# Altium PCB MBOARD.PCBDOC
Units mm, origin at the board's own origin, x right, y up, seen from the top; angles counter-clockwise.
Board outline 159.13 x 95.5 mm, 2 copper layers (Top Layer, Bottom Layer); 49 components, 50 nets, 204 pads, 90 vias.
Unrouted connection lines stored in the file: 152.
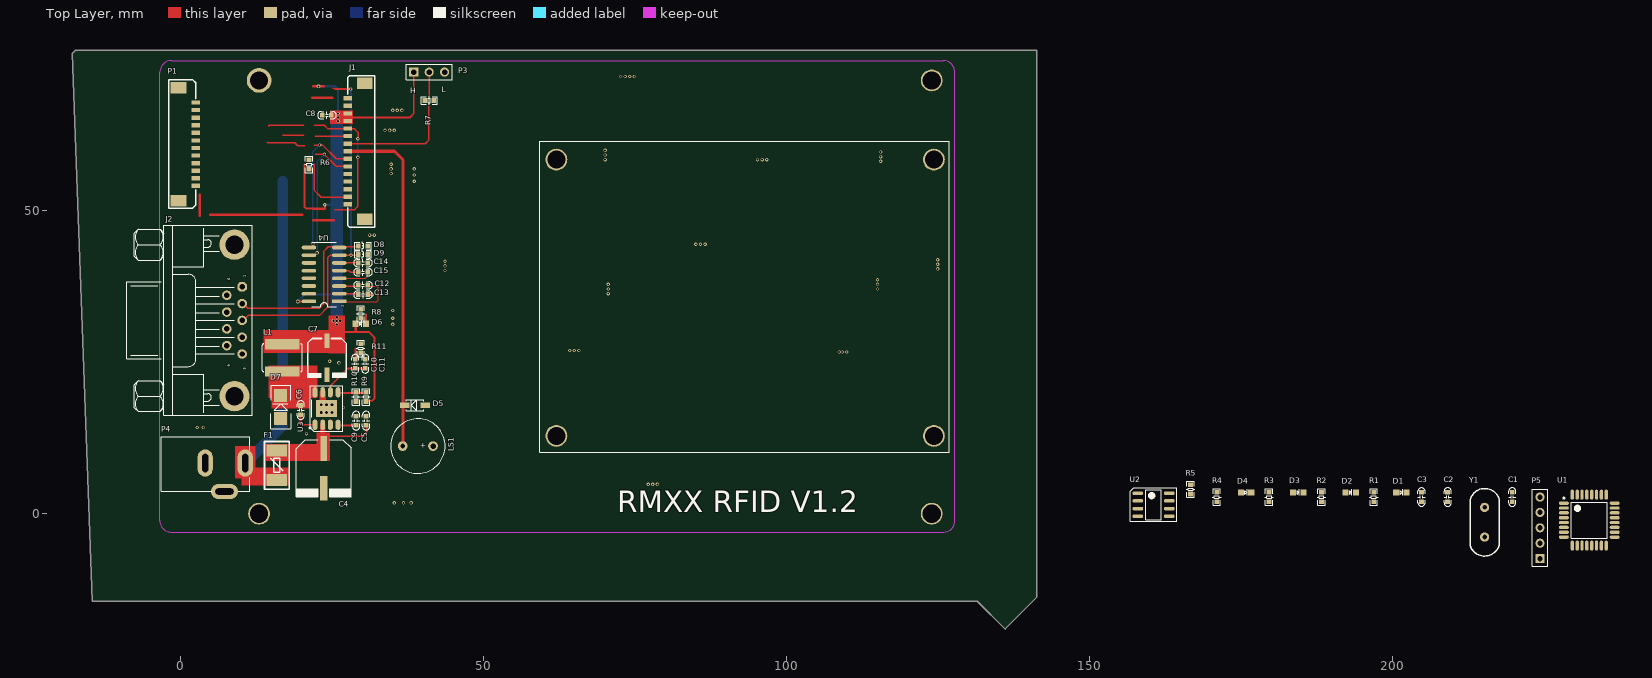
[diagram p0: Top Layer view]
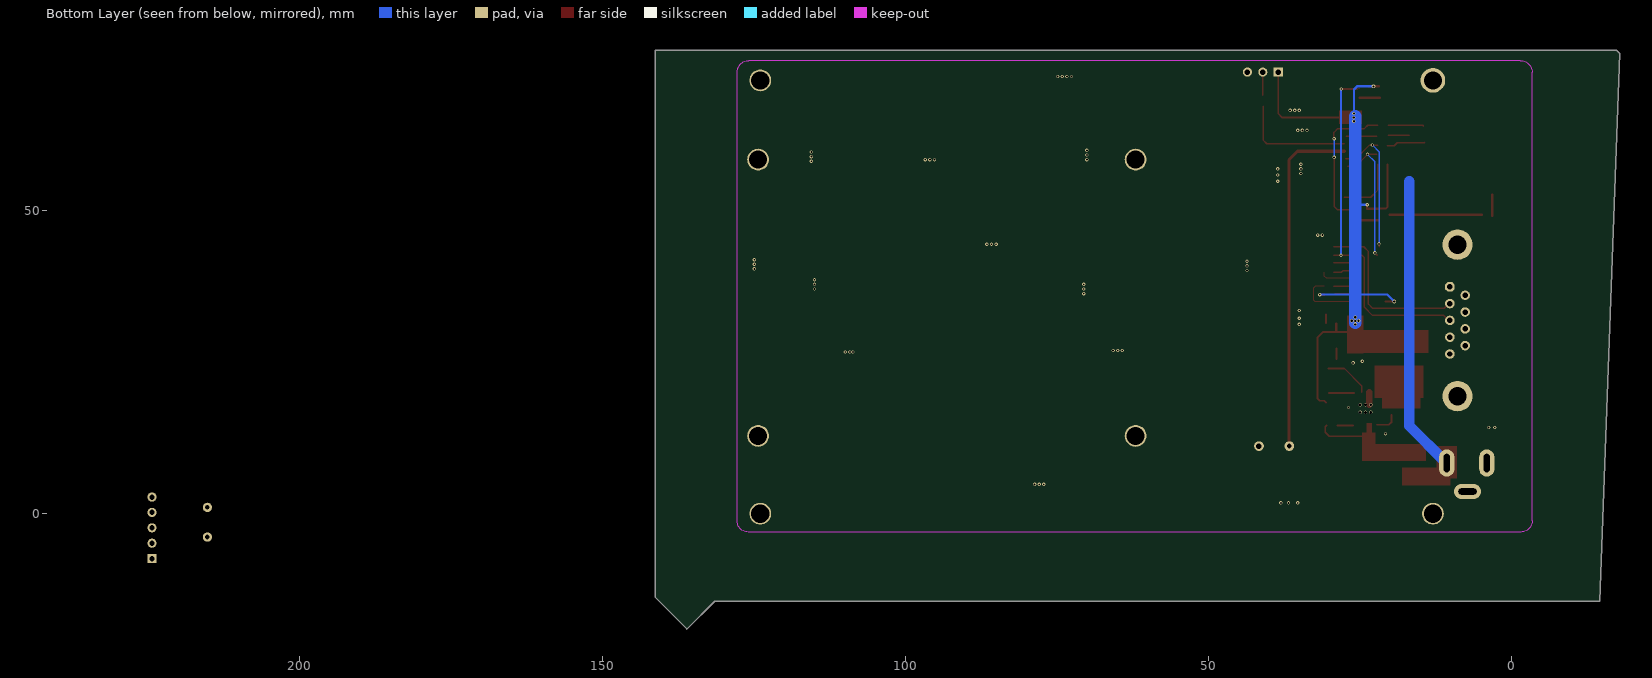
[diagram p1: Bottom Layer view, seen from below]

## Layer stack, top to bottom
Top Solder: solder mask 0.0102, Solder Resist, Dk 3.5
Top Layer: signal copper 0.0356
Dielectric1: core 0.32, FR-4, Dk 4.8
Bottom Layer: signal copper 0.0356
Bottom Solder: solder mask 0.0102, Solder Resist, Dk 3.5

## Board outline
-17.823,75.961 -17.315,76.469 141.308,76.469 141.308,-13.828 136.101,-19.035 131.529,-14.463 -14.521,-14.463

## Design rules (kind name [scope] priority, off if disabled: settings)
Clearance [All] p1 off: gap=0.381
ComponentClearance [All] p1 off: gap=0.254 collisioncheckmode=3 verticalgap=0.254 showdistances=FALSE
FabricationTestPointUsage TestPointUsage [All] p1: valid=0 allowmultiple=FALSE
FabricationTestpoint Testpoint [(IsPad And (OnTopLayer Or OnBottomLayer))] p1: side=3 testpointundercomponent=TRUE minsize=1.016 maxsize=2.54 preferedsize=1.524 minholesize=0 maxholesize=1.016 preferedholesize=0.813 testpointgrid=0.025 allowsidetop=TRUE allowsidebottom=TRUE usegrid=TRUE gridtolerance=0
HoleSize [All] p1: absolutevalues=TRUE maxlimit=7.62 minlimit=0 maxpercent=80.000 minpercent=20.000
PlaneConnect [All] p1: planeconnectstyle=Relief reliefexpansion=0.508 reliefentries=4 reliefconductorwidth=0.356 reliefairgap=0.254
PolygonConnect [All] p1: connectstyle=Direct reliefconductorwidth=0.381 reliefentries=4 polygonreliefangle="90 Angle" airgapwidth=0.254
RoutingVias [All] p1: holewidth=0.381 width=0.635 viastyle="Through Hole" minholewidth=0.203 minwidth=0.381 maxholewidth=5.08 maxwidth=7.62
SolderMaskExpansion [All] p1: expansion=0.102
Width [All] p1: maxlimit=2.54 minlimit=0.203 preferedwidth=0.254 minimp=50.000000 maximp=50.000000 favimp=50.000000
25 further rules are at their usual default settings.

## Components (designator, comment, footprint, x,y, rotation, side; value= is the part's Value field where it differs from the comment)
C1 "Cap" 0603C 219.814,2.745 r0 top
C2 "Cap" 0603C 209.146,2.745 r0 top
C3 "Cap" 0603C 204.828,2.745 r0 top
C4 "Cap Pol1" C8x10-SMD 23.673,7.468 r270 top
C5 "Cap" 0603C 30.658,15.342 r180 top
C6 "Cap" 0603C 19.865,17.096 r0 top
C7 "Cap Pol1" C6.3x5.4-SMD 24.183,25.732 r270 top
C8 "Cap" 0603C 24.181,65.761 r270 top
C9 "Cap" 0603C 29.007,15.342 r180 top
C10 "Cap" 0603C 28.88,24.74 r0 top
C11 "Cap" 0603C 30.531,24.74 r0 top
C12 "0.1uF" 0603C 30.15,37.694 r270 top
C13 "0.1uF" 0603C 30.152,36.146 r90 top
C14 "0.1uF" 0603C 30.15,41.377 r90 top
C15 "0.1uF" 0603C 30.15,39.853 r270 top
D1 "A" 0603-LED 201.526,3.507 r0 top
D2 "B" 0603-LED 193.144,3.507 r0 top
D3 "C" 0603-LED 184.508,3.507 r0 top
D4 "D" 0603-LED 175.872,3.507 r0 top
D5 "1N4007W" SOD-123 40.437,17.882 r270 top
D6 "LED" 0603-LED 29.769,31.344 r0 top
D7 "SS54" SMA 16.563,17.604 r90 top
D8 "ESD" 0603L 30.15,44.171 r270 top
D9 "ESD" 0603L 30.15,42.774 r270 top
F1 "Fuse Thermal" 1812F 15.926,5.563 r90 top
J1 "Interface" 1.25-15P 27.61,68.555 r270 top
J2 "DB9" DB-9/M 10.211,37.44 r0 top
L1 "Inductor" L-6045 16.817,23.446 r90 top
LS1 "Bell" BEEP-9x5.5 41.707,11.151 r180 top
P1 "OUT" 1.25-12P 2.54,51.054 r90 top
P3 "CS" HDR1X3 38.532,72.873 r0 top
P4 "POW" DC-005 4.242,8.357 r0 top
P5 "ISP" HDR1X5 224.386,-7.415 r90 top
R1 "Res1" 0603R 196.954,2.745 r0 top
R2 "Res1" 0603R 188.318,2.745 r0 top
R3 "Res1" 0603R 179.682,2.745 r0 top
R4 "Res1" 0603R 171.046,2.745 r0 top
R5 "Res1" 0603R 166.728,4.015 r0 top
R6 "Res Semi" 0603R 21.26,57.633 r0 top
R7 "Res Semi" 0603R 41.072,68.174 r90 top
R8 "Res1" 0603R 29.769,32.995 r0 top
R9 "Res Semi" 0603R 30.658,19.279 r0 top
R10 "Res Semi" 0603R 29.007,19.279 r0 top
R11 "Res Semi" 0603R 29.769,27.28 r180 top
U1 "ATmega48PA" 32A_N 232.514,-1.065 r0 top
U2 "IMP706SESA" SOIC8 160.632,1.475 r0 top
U3 "TPS54331" SOP8-POW 24.132,17.35 r90 top
U4 "SP3232EEN" SOIC16-1.27 23.802,38.813 r180 top
Y1 "XTAL" 49SD 215.242,-3.859 r90 top

## Footprints (in the part's own frame and the unit in brackets; to place one, negate y for a bottom-side part, rotate by r counter-clockwise, add the part's x,y. Pads: shape width x height; smd on the part's side, far side on the other; paste and mask are expansions set on the pad)
1.25-12P [mm]
  rect 1.9x2.6 smd: 0(0.591,2.835) 0(19.241,2.835)
  rect 0.7x1.4 smd: 1(16.791,0) 2(15.541,0) 3(14.291,0) 4(13.041,0) 5(11.791,0) 6(10.541,0) 7(9.291,0) 8(8.041,0) 9(6.791,0) 10(5.541,0) 11(4.291,0) 12(3.041,0)
  silkscreen extent -0.66,0 20.57,4.45
1.25-15P [mm]
  rect 1.9x2.6 smd: 0(-2.45,2.835) 0(19.95,2.835)
  rect 0.7x1.4 smd: 1(17.5,0) 2(16.25,0) 3(15,0) 4(13.75,0) 5(12.5,0) 6(11.25,0) 7(10,0) 8(8.75,0) 9(7.5,0) 10(6.25,0) 11(5,0) 12(3.75,0) 13(2.5,0) 14(1.25,0) 15(0,0)
  silkscreen extent -3.7,0 21.28,4.45
32A_N [mm] "32-Pin Thin Quad Flat Pack 0.8 mm Pitch, IPC Medium Density"
  oval 1.65x0.55 smd: 1(-4.2,2.8) 2(-4.2,2) 3(-4.2,1.2) 4(-4.2,0.4) 5(-4.2,-0.4) 6(-4.2,-1.2) 7(-4.2,-2) 8(-4.2,-2.8) 17(4.2,-2.8) 18(4.2,-2) 19(4.2,-1.2) 20(4.2,-0.4) 21(4.2,0.4) 22(4.2,1.2) 23(4.2,2) 24(4.2,2.8)
  oval 0.55x1.65 smd: 9(-2.8,-4.2) 10(-2,-4.2) 11(-1.2,-4.2) 12(-0.4,-4.2) 13(0.4,-4.2) 14(1.2,-4.2) 15(2,-4.2) 16(2.8,-4.2) 25(2.8,4.2) 26(2,4.2) 27(1.2,4.2) 28(0.4,4.2) 29(-0.4,4.2) 30(-1.2,4.2) 31(-2,4.2) 32(-2.8,4.2)
  silkscreen extent -4.32,-2.95 2.95,3.75, body extent -3.5,-3.5 3.5,3.5, height 1.2
49SD [mil]
  round 60 hole 30: 1(0,0) 2(193,0)
  silkscreen extent -124,-95 315,94
0603-LED [mm]
  rect 1x1 smd: 1(-0.864,0) 2(0.864,0)
  silkscreen extent -0.18,-0.51 0.18,0.56
0603C [mil]
  rect 31.5x30 smd: 1(0,30) 2(0,-30)
  silkscreen extent -24,-60 24,60
0603L [mm]
  rect 0.8x0.762 smd: 1(-0.023,-0.76) 2(-0.023,0.764)
  silkscreen extent -0.72,-1.36 0.68,1.36
0603R [mil]
  rect 31.5x30 smd: 1(0,30) 2(0,-30)
  silkscreen extent -28,-53 28,53
1812F [mm]
  rect 2x3.4 smd: 1(0,0) 2(4.85,0)
  silkscreen extent -1.5,-2.03 6.35,2.03
BEEP-9x5.5 [mm]
  round 1.6 hole 0.8: 1(5,0)
  round 1.6 hole 0.9: 2(0,0)
  silkscreen extent -2,-4.5 7,4.5
C6.3x5.4-SMD [mm]
  rect 2.4x0.85 smd: 1(-2.794,0) 2(2.794,0)
  silkscreen extent -3.18,-3.3 3.3,3.3, body extent -3.24,-3.18 3.24,3.18, height 3.5
C8x10-SMD [mm]
  rect 4.1x1.148 smd: 1(-3.277,0)
  rect 4.1x1.25 smd: 2(3.277,0)
  silkscreen extent -4.7,-4.5 4.7,4.5, body extent -4.65,-4.25 4.65,4.25, height 10.5
DB-9/M [mil]
  oct 62x62 hole 35: 1(0,0)
  round 62 hole 35: 2(0,-109.17) 3(0,-218.33) 4(0,-327.5) 5(0,-436.67) 6(-100,-55) 7(-100,-164.17) 8(-100,-273.33) 9(-100,-382.5)
  round 196.67 hole 118.33: BO1(-50,-710.83) BO2(-50,273.33)
  silkscreen extent -750,-835 67,398
DC-005 [mm]
  oval 2.5x4.5 hole 1 slot 3 at 90 deg: 1(6.477,0) 2(-0.127,0)
  oval 4.5x2.5 hole 1 slot 3 at 0 deg: 3(3.048,-4.699)
  silkscreen extent -7.37,-4.63 7.23,4.37
HDR1X3 [mm] "Connector; Header; 3 Position"
  rect 1.5x1.5 hole 0.9: 1(0,0)
  round 1.5 hole 0.9: 2(2.54,0) 3(5.08,0)
  silkscreen extent -1.27,-1.27 6.35,1.27
HDR1X5 [mm] "Connector; Header; 5 Position"
  rect 1.5x1.5 hole 0.9: 1(0,0)
  round 1.5 hole 0.9: 2(2.54,0) 3(5.08,0) 4(7.62,0) 5(10.16,0)
  silkscreen extent -1.27,-1.27 11.43,1.27
L-6045 [mm]
  rect 1.7x5.7 smd: 1(0,0) 2(4.5,0)
  silkscreen extent 0,-3.3 4.57,3.3
SMA [mm] "Molded Diode, 2-Leads, Body 4.3x2.7mm, IPC Medium Density"
  rect 2.15x2.15 smd: 1(-1.93,0) 2(1.93,0)
  silkscreen extent -3.56,-1.65 3.56,1.65, body extent -2.28,-1.42 2.29,1.42, height 2.95
SOD-123 [mm]
  rect 0.85x1.524 smd: 1(0,0) 2(0,-3.4)
  silkscreen extent -0.9,-3.15 0.9,-0.25
SOIC8 [mm]
  oval 1.8x0.6 smd: 1(-2.625,1.905) 2(-2.625,0.635) 3(-2.625,-0.635) 4(-2.625,-1.905) 5(2.575,-1.905) 6(2.575,-0.635) 7(2.575,0.635) 8(2.575,1.905)
  silkscreen extent -3.89,-2.74 3.84,2.77, body extent -2.03,-2.5 1.97,2.5, height 1.76
SOIC16-1.27 [mm]
  rect 2.4x0.6 smd: 1(-2.432,3.787)
  oval 2.4x0.6 smd: 2(-2.432,2.517) 3(-2.432,1.247) 4(-2.432,-0.023) 5(-2.432,-1.293) 6(-2.432,-2.563) 7(-2.432,-3.833) 8(-2.432,-5.103) 9(2.568,-5.103) 10(2.568,-3.833) 11(2.568,-2.563) 12(2.568,-1.293) 13(2.568,-0.023) 14(2.568,1.247) 15(2.568,2.517) 16(2.568,3.787)
  silkscreen extent -1.93,-5.96 2.07,4.64
SOP8-POW [mm]
  oval 1.7x0.8 smd: 1(-2.675,1.905) 2(-2.675,0.635) 3(-2.675,-0.635) 4(-2.675,-1.905) 5(2.675,-1.905) 6(2.675,-0.635) 7(2.675,0.635) 8(2.675,1.905)
  rect 2.8x3.4 smd: 9(0,0)
  silkscreen extent -3.78,-2.7 3.77,2.82

## Part data
C1 C2 C3 C5 C6 C8 C9 C10 C11: "Capacitor"
C4 C7: "Polarized Capacitor (Radial)"
C12 C13 C14 C15: library part 电容, "电容"
D1 D2 D3 D4: library part LED2, "Typical RED, GREEN, YELLOW, AMBER GaAs LED"
D5: library part "Diode 1N5408", "3 Amp Medium Power Silicon Rectifier Diode"
D6: library part LED1, "Typical RED GaAs LED"
D7: library part "D Schottky", "Schottky Diode"
D8 D9: library part 电感
F1: "Thermal Fuse"
J1: library part "Header 15", "Header, 15-Pin"
LS1: "Electrical Bell"
P1: library part "Header 12", "Header, 12-Pin"
P3: library part "Header 3", "Header, 3-Pin"
P4: library part "Header 2", "Header, 2-Pin"
P5: library part "Header 5", "Header, 5-Pin"
R1 R2 R3 R4 R5 R8: "Resistor"
R6 R7 R9 R10 R11: "Semiconductor Resistor"
U1: library part ATmega8-16AC, "8-Bit AVR Microcontroller with 8K Bytes of In-System Programmable Flash Memory"
U2: library part MAX706RCSA, "+3V Voltage Monitoring, Low-Cost, 礟 Supervisory Circuit"
U4: library part MAX232ESE
Y1: "Crystal Oscillator"

## Free pads (board coordinates)
  round 3.6 hole 3: 8(13,0) 8(62.06,12.835) 8(62.06,58.435) 8(124,0) 8(124.36,12.835) 8(124.36,58.435)
  round 4.064 hole 3: 8(13,71.5)
  round 3.6 hole 3 mask+0.102: 8(124,71.5)

## Via types
v1: diameter 0.559, hole 0.305, Top Layer to Bottom Layer, 74 vias
v2: diameter 0.559, hole 0.356, Top Layer to Bottom Layer, 8 vias
v3: diameter 0.559, hole 0.457, Top Layer to Bottom Layer, 6 vias
v4: diameter 0.61, hole 0.356, Top Layer to Bottom Layer, 2 vias

## Nets (pads, with @x,y where several pads share a name; then routed paths per layer and width w, separated by ;. In a path a pad name is that pad's centre, name@x,y a point inside that pad or via, vN(x,y) a via of type N, cw(c..) or ccw(c..) an arc to the next point about the centre after c; other vN are vias at no path point)
+5V: C3.2 C7.1 C8.1 C13.2 D6.1 J1.3 J1.4 L1.2 P3.1 R5.2 R6.1 R9.2 U1.4 U1.6 U1.18 U2.2 U4.16 | length 107.6
  Top Layer w0.305: 20.472,57.658 20.472,50.673 20.803,50.343 21.92,50.343 ; v1@23.8,50.978 v1@23.876,50.978 ; 28.016,65.354 37.846,65.354 38.532,66.04 P3.1 ; R9.2@30.658,18.366 30.936,18.644 31.674,18.644 32.055,19.025 32.055,29.058 31.126,29.987
  Top Layer w0.381: v4@19.406,35.026 U4.16@20.803,35.026 ; 21.895,70.521 23.658,70.521 ; 21.946,50.328 23.876,50.328 v1@23.876,50.978 ; 26.246,29.987 31.126,29.987 ; 28.931,30.074 D6.1@28.931,31.394 ; C13.2 v1(31.676,36.146)
  Bottom Layer w0.381: v4@19.406,35.052 20.523,36.17 31.598,36.17 v1@31.648,36.119 ; v4@22.936,70.51 25.527,70.51 26.035,70.002 v2@26.035,65.989 ; v1(23.851,50.978) 25.298,50.978
  Bottom Layer w2.032: v2@25.806,31.471 25.806,65.608
  other v2: 25.832,31.242 25.832,31.801 25.273,31.826 26.391,31.826 25.832,32.41 26.035,64.77 26.06,65.38 26.035,66.04
  other v4: 19.38,35.027 22.809,70.51
A: R1.1 U1.9
B: R2.1 U1.10
C: R3.1 U1.11
CS: P3.2 R7.2 | length 4
  Top Layer w0.254: 41.072,69.037 P3.2@41.072,73.025
D: R4.1 U1.12
DOG: U1.2 U2.6
GND: C1.2 C2.2 C3.1 C4.2 C5.2 C7.2 C8.2 C9.2 C11.1 C14.2 D1.2 D2.2 D3.2 D4.2 D5.1 D7.1 D8.2 D9.2 J1.1 J1.2 J2.5 J2.BO1 J2.BO2 LS1.2 P1.1 P3.3 P4.2 P5.1 pad.8@13,0 pad.8@13,71.5 pad.8@124,0 pad.8@124,71.5 R8.1 R10.2 R11.1 U1.3 U1.5 U1.21 U2.3 U3.7 U3.9 U4.15 | length 12.4
  Top Layer w0.254: 22.073,57.658 22.073,53.416 23.266,52.222 J1.2@27.661,52.222
  Top Layer w1.016: U3.9@23.497,17.985 U3.7
  other v1: 35.306,1.778 36.83,1.778 36.83,1.778 38.1,1.778 77.216,4.826 77.978,4.826 78.74,4.826 20.828,13.208 2.794,14.224 3.81,14.224 26.924,17.526 26.162,24.892 24.638,25.146 108.712,26.67 109.22,26.67 109.982,26.67 64.262,26.924 65.024,26.924 65.786,26.924 35.052,31.242 35.052,32.258 35.052,33.528 70.612,36.322 70.612,37.084 115.062,37.084 70.612,37.846 115.062,37.846 115.062,38.608 43.688,40.132 124.968,40.386 43.688,40.894 124.968,41.148 43.688,41.656 124.968,41.91 85.09,44.45 85.852,44.45 86.614,44.45 31.242,45.974 32.004,45.974 38.608,54.864 38.608,55.88 34.798,56.134 34.798,56.896 38.608,56.896 34.798,57.658 115.57,58.166 70.104,58.42 95.25,58.42 96.012,58.42 96.774,58.42 115.57,58.928 70.104,59.182 115.57,59.69 70.104,59.944 33.782,63.246 34.544,63.246 35.306,63.246 35.052,66.548 35.814,66.548 36.576,66.548 72.644,72.136 73.406,72.136 74.168,72.136 74.93,72.136
  other v3: 23.243,16.715 24.132,16.715 25.021,16.715 23.243,17.985 24.132,17.985 25.021,17.985
MISO: P5.4 U1.16
MOSI: P5.5 U1.15
NetC1_1: C1.1 U1.7 Y1.2
NetC2_1: C2.1 U1.8 Y1.1
NetC4_1: C4.1 C5.1 F1.2 U3.2 | length 8
  Top Layer w0.254: 24.31,12.778 30.126,12.778 30.785,13.437 30.785,14.326 C5.1@30.531,14.58
NetC6_1: C6.1 D7.2 L1.1 U3.8
NetC6_2: C6.2 U3.1 | length 3.8
  Top Layer w0.305: C6.2 19.865,15.064 20.254,14.675 U3.1
NetC9_1: C9.1 U3.4 | length 2.6
  Top Layer w0.305: U3.4@26.156,14.556 C9.1@28.755,14.556
NetC10_1: C10.1 R11.2 | length 1.8
  Top Layer w0.305: C10.1@28.905,25.502 28.905,27.28
NetC10_2: C10.2 C11.2 U3.6 | length 7.8
  Top Layer w0.254: U3.6 24.767,21.109 27.612,23.954 28.755,23.954 C11.2@30.279,23.954
NetC12_1: C12.1 U4.1 | length 10.2
  Top Layer w0.203: U4.1@26.596,34.876 26.723,35.003 32.438,35.003 32.692,35.257 32.692,37.289 32.438,37.543 C12.1@30.914,37.543
NetC12_2: C12.2 U4.3 | length 3.1
  Top Layer w0.254: U4.3 C12.2@29.367,37.566
NetC13_1: C13.1 U4.2 | length 3
  Top Layer w0.254: U4.2 C13.1@29.24,36.296
NetC14_1: C14.1 U4.6 | length 3.1
  Top Layer w0.254: U4.6 C14.1@29.367,41.376
NetC15_1: C15.1 U4.4 | length 5.5
  Top Layer w0.203: U4.4 30.556,38.836 30.914,39.194 C15.1@30.914,39.829
NetC15_2: C15.2 U4.5 | length 3.3
  Top Layer w0.254: U4.5 27.843,40.106 28.12,39.829 C15.2@29.39,39.829
NetD1_1: D1.1 R1.2
NetD2_1: D2.1 R2.2
NetD3_1: D3.1 R3.2
NetD4_1: D4.1 R4.2
NetD5_2: D5.2 J1.8 LS1.1 | length 56.9
  Top Layer w0.508: J1.8 35.344,59.805 36.754,58.395 LS1.1@36.754,11.176
NetD6_2: D6.2 R8.2 | length 1.3
  Top Layer w0.381: D6.2@30.632,31.521 30.632,32.817
NetJ1_7: J1.7 R7.1
NetJ1_14: J1.14 R6.2
NetR5_1: R5.1 U2.4
NetR9_1: R9.1 R10.1 U3.5 | length 4.1
  Top Layer w0.305: U3.5@26.037,19.898 30.144,19.898
NetU2_1: U2.1 U2.8
RST: P5.2 U1.29 U2.7
RX: J1.9 P1.10 U1.30 U4.9 | length 23.4
  Top Layer w0.254: U4.9@21.895,44.018 v1@21.895,44.501 ; 22.149,60.833 23.47,60.833 25.748,58.555 27.356,58.555
  Bottom Layer w0.254: v1(21.895,44.526) 21.895,59.741 v1(22.987,60.833)
RXD: D8.1 J2.2 U4.8 | length 28.6
  Top Layer w0.254: J2.2@10.363,34.671 11.125,33.909 22.962,33.909 23.647,34.595 23.647,43.256 24.434,44.043 D8.1@29.39,44.043
SCK: P5.3 U1.17
TX: J1.10 P1.11 U1.31 U4.10 | length 27.9
  Top Layer w0.254: U4.10@22.2,42.647 v1(22.581,43.028) ; 22.277,62.305 26.52,62.305 J1.10@27.33,62.306 ; 22.301,59.284 v1(23.8,59.284) 25.732,57.351 27.076,57.351
  Bottom Layer w0.254: v1(22.581,43.028) 22.581,58.064 v1(23.8,59.284)
TXD: D9.1 J2.3 U4.7 | length 58.4
  Top Layer w0.254: J2.3@10.363,31.877 11.201,32.715 22.962,32.715 24.333,34.087 24.333,42.291 24.688,42.646 D9.1@29.392,42.646 ; 25.197,70.231 25.206,70.232 ; 25.476,70.079 v1(28.118,70.079)
  Bottom Layer w0.254: v1(28.169,42.647) v1@28.169,70.079
VIN: F1.1 P1.12 P4.1 | length 48.8
  Bottom Layer w1.778: P4.1@10.922,8.509 16.916,14.503 16.916,54.813
WG_A1: P1.2 U1.23
WG_A2: P1.4 U1.25
WG_A3: P1.6 U1.27
WG_A4: P1.8 U1.13
WG_B1: P1.3 U1.24
WG_B2: P1.5 U1.26
WG_B3: P1.7 U1.28
WG_B4: P1.9 U1.14
pads on no net: J1.0 J1.5 J1.6 J1.11 J1.12 J1.13 J1.15 J2.1 J2.4 J2.6 J2.7 J2.8 J2.9 P1.0 P4.3 U1.1 U1.19 U1.20 U1.22 U1.32 U2.5 U3.3 U4.11 U4.12 U4.13 U4.14
copper on no net: | length 84.5
  Top Layer w0.254: 14.376,61.265 14.427,61.214 18.872,61.214 19.38,60.706 20.498,60.706 ; 14.63,63.932 14.63,64.11 20.371,64.11 ; 16.942,62.459 20.396,62.459 ; 22.149,64.11 23.749,64.11 24.308,63.551 28.702,63.551 29.337,62.916 v1@29.337,61.849 ; 25.502,50.14 28.753,50.14 29.286,50.673 v1@29.286,58.776 ; 27.61,61.055 40.43,61.055 41.021,61.646 41.021,67.234
  Top Layer w0.381: 3.226,49.124 3.226,52.68 ; 4.928,49.327 20.142,49.327 ; 21.768,68.631 25.095,68.631 ; 21.895,48.438 25.375,48.438
  Bottom Layer w0.254: v1@29.286,58.776 v1@29.286,61.849
  other v1: 29.312,58.801 29.312,61.874

## Keep-outs
Keep-Out Layer:
  lines w0.203: -3.378,-1.194 ccw(c-1.539,-1.194) -1.539,-3.033 125.999,-3.033 ccw(c125.999,-1.219) 127.813,-1.219 127.813,72.847 ccw(c125.882,72.847) 125.882,74.778 -1.422,74.778 ccw(c-1.422,72.822) -3.378,72.822 -3.378,-1.194

## Other copper
Top Layer:
  rectangle net +5V: 24.74,64.338 28.499,66.573
  rectangle net +5V: 24.46,26.467 27.153,32.741
  rectangle net VIN: 9.068,5.817 12.37,11.151
  rectangle net VIN: 10.084,4.674 18.085,7.595
  rectangle net NetC4_1: 14.148,8.714 24.689,11.508
  rectangle net NetC6_1: 15.039,17.35 21.432,21.16
  rectangle net NetC6_1: 20.881,19.128 22.659,21.16
  rectangle net NetC6_1: 14.531,19.128 22.659,24.462
  rectangle net +5V: 13.769,26.494 26.723,30.304
  rectangle net NetC4_1: 23.04,13.286 23.929,14.937
  rectangle net NetC4_1: 22.497,11 24.691,13.413

## Silkscreen, mask and mechanical layers (free items; w line width, h text height)
Top Overlay:
  lines w0.152: 59.36,10.135 126.86,10.135 126.86,61.435 59.36,61.435 59.36,10.135
  text "L" at 43.18,69.215 h1.52
  text "H" at 37.973,69.088 h1.52
  text "RMXX RFID V1.2" at 72.136,-1.016 h6.1
Top Solder:
  rectangle: 69.342,35.306 117.729,61.214

## Text inside footprints (layer, text, board x,y; h text height)
J2: Top Overlay "6" at 8.433,38.498 h0.76 r90; Top Overlay "1" at 10.973,39.006 h0.76 r90; Top Overlay "5" at 10.973,23.766 h0.76 r90; Top Overlay "9" at 8.433,24.274 h0.76 r90
LS1: Top Overlay "+" at 40.564,11.913 h1.52 r180
U4: Top Overlay "1" at 27.174,34.035 h0.76 r90